# EAGLE board Cruzada_GPS_2015_rev1 (EAGLE 7.4.0)
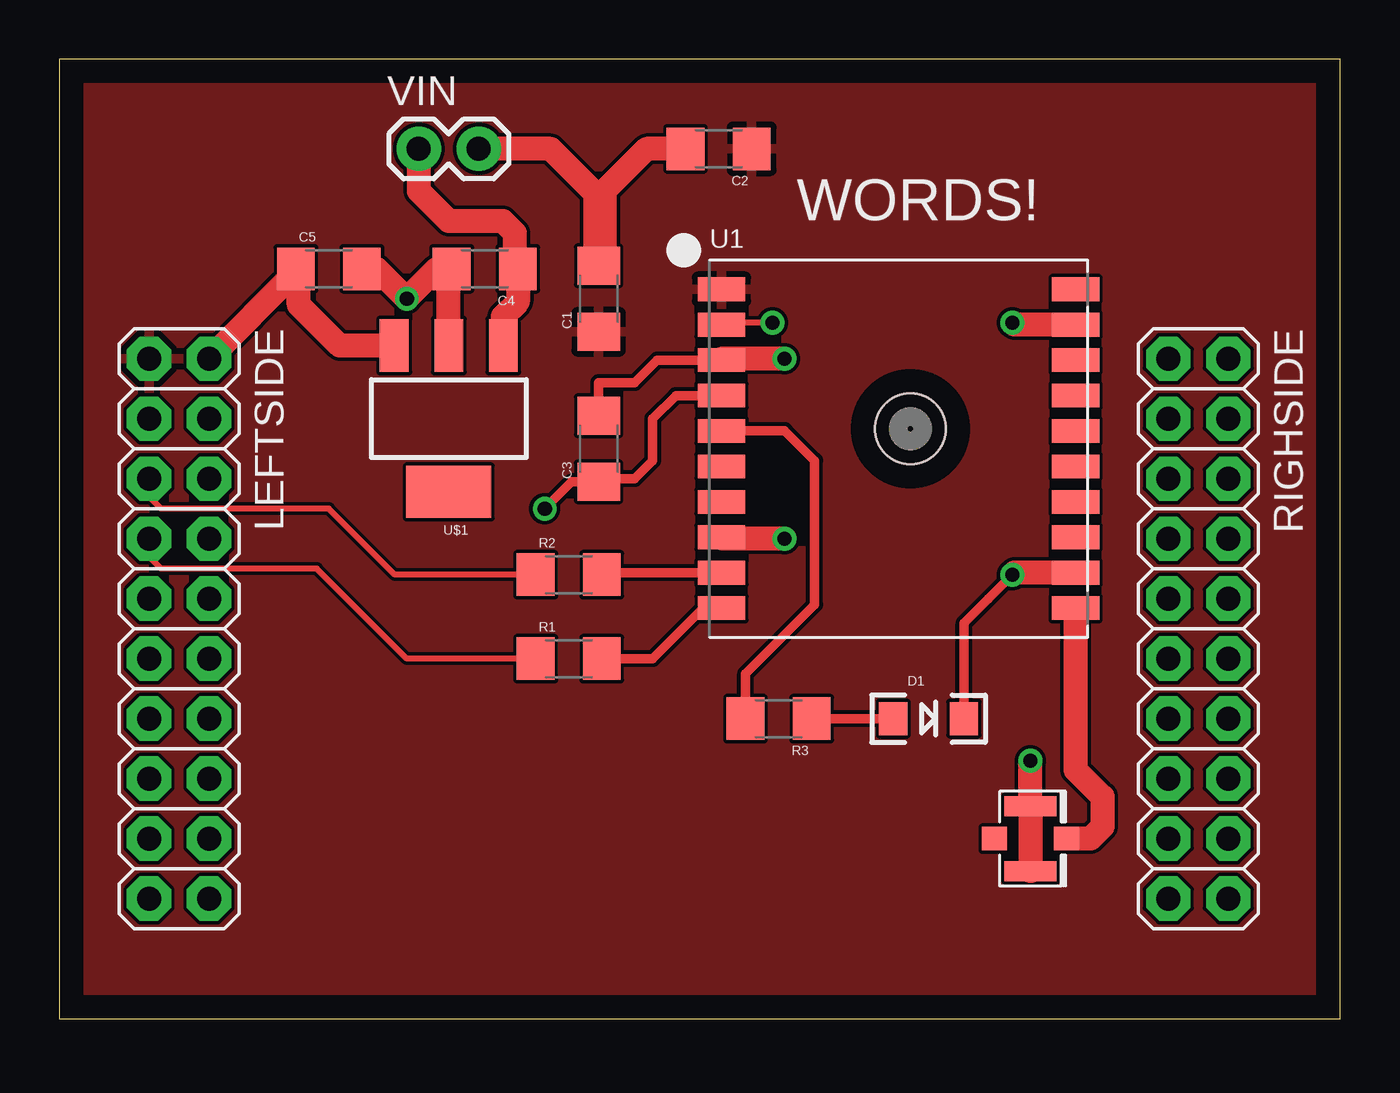
[diagram p0: board, top side]
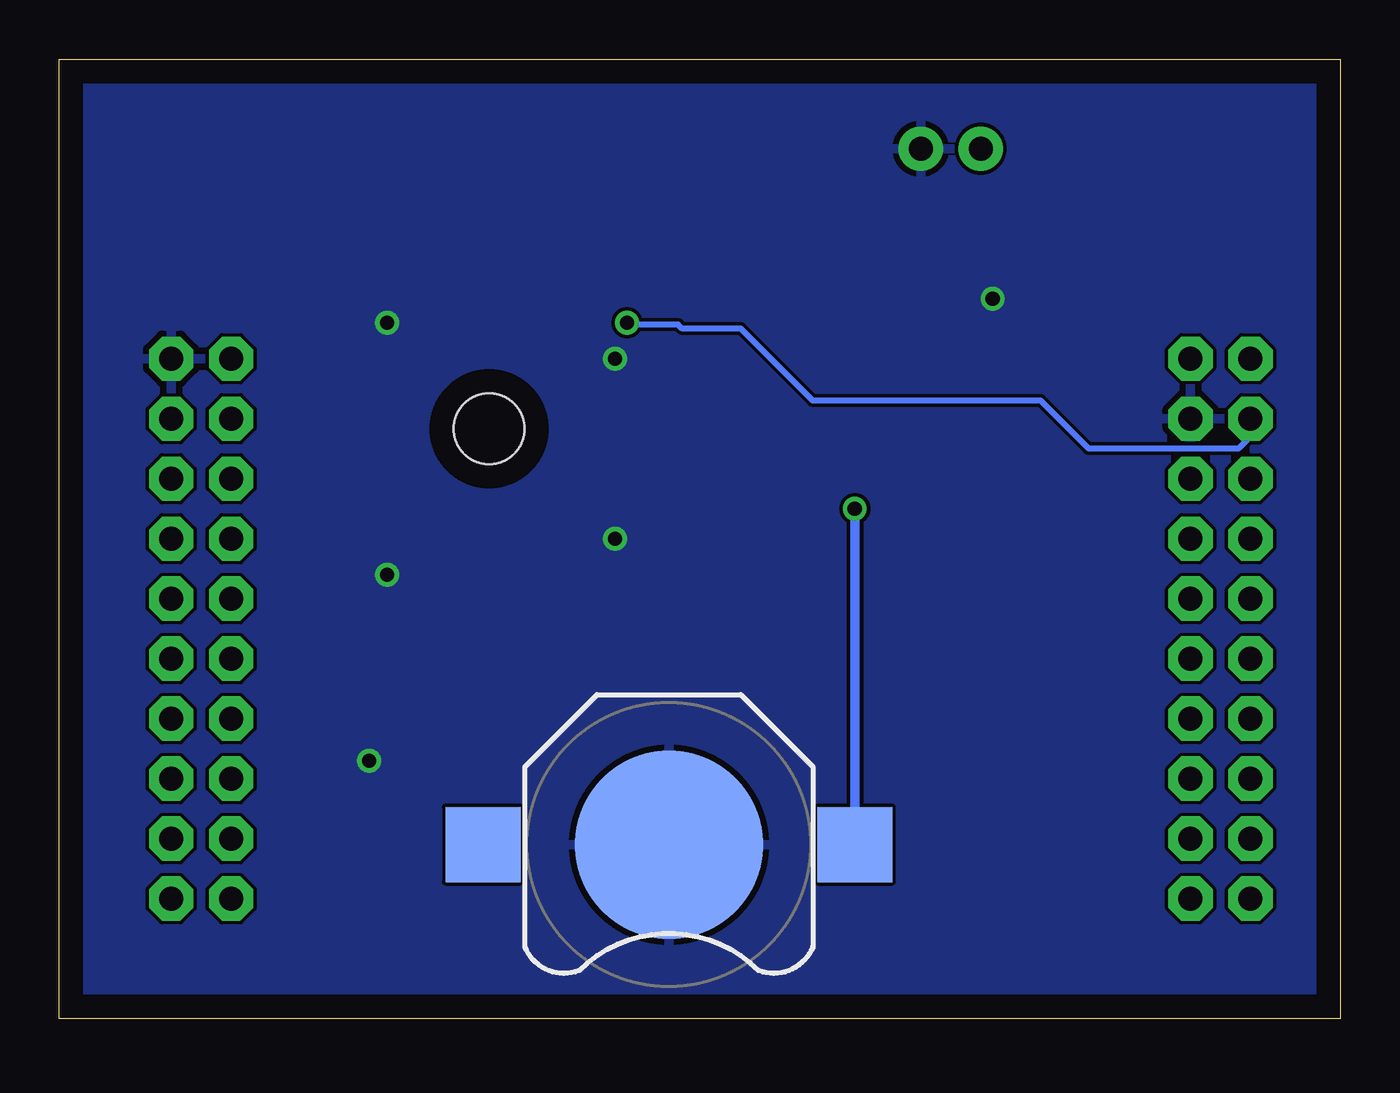
[diagram p1: board, bottom side, seen from below]

Size 54.28 x 40.63 mm. Coordinates in mm from the lower left corner, seen from the top.
Outline: 0,0 54.28,0 54.28,40.63 0,40.63 0,0
Copper layers (1*16): Top 0.035mm / dielectric 1.5mm / Bottom 0.035mm
Design rules "default *": minimum track width 10mil, minimum drill 13mil, track to track 6mil, track to pad 6mil, pad to pad 6mil, via to via 6mil, smd to smd 6mil, copper to edge 40mil, drill to drill 8mil, minimum pad ring 10mil, minimum via ring 8mil, stop-mask expansion 4mil, vias tented up to drill 0mil, thermal gap 10mil

## Footprints (pad centres in the part's own frame; a part is rotated, then mirrored left to right if it is on the bottom)
1206 = smd 1.6 x 1.8: 1 -1.4,0; 2 1.4,0
BATTCON_12MM = smd 8 x 8: GND 0,0 | smd 3.175 x 3.175: PWR@1 -7.874,0; PWR@2 7.874,0
LED-1206 = smd 1.2 x 1.4: A -1.5,0; C 1.5,0
U.FL = smd 2.2 x 0.85: P$1 0,1.375; P$2 0,-1.375 | smd 1.05 x 1: P$3 1.525,0; P$4 -1.525,0
2X10 = drill 1.016 pad 1.88 octagon: 1 -11.43,-1.27; 2 -11.43,1.27; 3 -8.89,-1.27; 4 -8.89,1.27; 5 -6.35,-1.27; 6 -6.35,1.27; 7 -3.81,-1.27; 8 -3.81,1.27; 9 -1.27,-1.27; 10 -1.27,1.27; 11 1.27,-1.27; 12 1.27,1.27; 13 3.81,-1.27; 14 3.81,1.27; 15 6.35,-1.27; 16 6.35,1.27; 17 8.89,-1.27; 18 8.89,1.27; 19 11.43,-1.27; 20 11.43,1.27
FGPMMOPA6H = smd 2 x 1: P$1 -7.5,6.75; P$2 -7.5,5.25; P$3 -7.5,3.75; P$4 -7.5,2.25; P$5 -7.5,0.75; P$6 -7.5,-0.75; P$7 -7.5,-2.25; P$8 -7.5,-3.75; P$9 -7.5,-5.25; P$10 -7.5,-6.75; P$11 7.5,-6.75; P$12 7.5,-5.25; P$13 7.5,-3.75; P$14 7.5,-2.25; P$15 7.5,-0.75; P$16 7.5,0.75; P$17 7.5,2.25; P$18 7.5,3.75; P$19 7.5,5.25; P$20 7.5,6.75 | hole 3: 0.5,0.85
SOT223 = smd 1.219 x 2.235: 1 -2.311,-3.099; 2 0,-3.099; 3 2.311,-3.099 | smd 3.6 x 2.2: 4 0,3.099
1X02 = drill 1.016 pad 1.88: 1 0,0; 2 2.54,0

## Placement (x,y rotation side)
C1  1uF  [1206]  22.86,30.48 90 top
C2  0.01uF  [1206]  27.94,36.83 180 top
C3  1uF  [1206]  22.86,24.13 90 top
C4  1uF  [1206]  18.03,31.75 180 top
C5  1uF  [1206]  11.43,31.75 0 top
CR1220  3.7V  [BATTCON_12MM]  28.45,7.37 180 bottom
D1  [LED-1206]  36.83,12.7 0 top
J1  U.FL  [U.FL]  41.15,7.62 0 top
LEFTSIDE  [2X10]  5.08,16.51 270 top
R1  330  [1206]  21.59,15.24 0 top
R2  330  [1206]  21.59,18.8 0 top
R3  330  [1206]  30.48,12.7 180 top
RIGHSIDE  [2X10]  48.26,16.51 270 top
U1  [FGPMMOPA6H]  35.56,24.13 0 top
U$1  V_REG_LD1117#50  [SOT223]  16.51,25.4 180 top
VIN  [1X02]  15.24,36.83 0 top

## Library data of the parts
C1-C5 = SparkFun-Capacitors
CR1220 = SparkFun-Electromechanical; PROD_ID: BATT-08044
D1 = SparkFun-LED
J1 = SparkFun-Connectors; PROD_ID: CONN-09193
LEFTSIDE RIGHSIDE VIN = SparkFun-Connectors
R1-R3 = SparkFun-Resistors
U1 = adafruit
U$1 = SparkFun-PowerIC

## Nets
3.3V: C1.1 C2.1 LEFTSIDE.1 U1.P$1
5V: C5.1 LEFTSIDE.2 U$1.3
DATA_IN: LEFTSIDE.7 R1.1
DATA_OUT: LEFTSIDE.5 R2.1
EX_ANT: J1.P$3 U1.P$11
GND: C1.2 C2.2 C3.2 C4.2 C5.2 CR1220.GND D1.C J1.P$1 J1.P$2 LEFTSIDE.4 RIGHSIDE.2 U1.P$3 U1.P$8 U1.P$12 U1.P$19 U$1.2 VIN.2
N$1: R3.2 U1.P$5
N$2: D1.A R3.1
N$3: R2.2 U1.P$9
N$4: R1.2 U1.P$10
NRESET: LEFTSIDE.3 U1.P$2
VBACKUP: C3.1 CR1220.PWR@1 U1.P$4
VIN: C4.1 U$1.1 VIN.1

## Tracks (layer width: path | path; a pad name or v marks a point on that pad's centre or on a via)
3.3V
  pour Top: -2.54,49.53 64.77,49.53 64.77,-6.35 -10.16,-6.35 -10.16,49.53
5V
  Top 1.016: U$1.3 11.89,28.5 10.16,30.23 10.16,31.62 C5.1 10.03,31.62 LEFTSIDE.2
DATA_IN
  Top 0.254: R1.1 14.73,15.24 10.92,19.05 4.32,19.05 3.81,19.56 LEFTSIDE.7
DATA_OUT
  Top 0.254: R2.1 14.22,18.8 11.43,21.59 4.32,21.59 3.81,22.1 LEFTSIDE.5
EX_ANT
  Top 1.016: U1.P$11 43.06,10.53 44.2,9.4 44.2,8.13 43.69,7.62 J1.P$3
GND  (via drill 0.6)
  Top 0.406: 39.37,17.78 v40.39,18.8 38.33,16.74 D1.C | U1.P$3 25.34,27.88 24.38,26.92 22.86,26.92 C3.2
  Top 1.016: C5.2 13.46,31.75 v14.73,30.48 16,31.75 C4.2 16.51,31.63 U$1.2 | v30.73,27.94 28.12,27.94 U1.P$3 | v30.73,20.32 28.12,20.32 U1.P$8 | U1.P$12 40.47,18.88 v40.39,18.8 | U1.P$19 40.47,29.38 v40.39,29.46 | J1.P$2 J1.P$1 v41.15,10.92 | C2.2 24.89,36.83 23.11,35.05 23.11,32.13 C1.2 22.73,31.88 22.73,34.93 20.83,36.83 VIN.2
  pour Bottom: 61.21,46.99 60.96,-2.79 -6.35,-2.79 -6.1,46.99
N$1
  Top 0.406: R3.2 29.08,14.6 32,17.53 32,23.62 30.73,24.89 28.07,24.89 U1.P$5
N$2
  Top 0.406: D1.A R3.1
N$3
  Top 0.406: U1.P$9 23.07,18.88 R2.2
N$4
  Top 0.406: U1.P$10 27.29,17.38 25.15,15.24 R1.2
NRESET  (via drill 0.6)
  Top 0.254: v30.23,29.46 28.14,29.46 U1.P$2
  Bottom 0.254: LEFTSIDE.3 3.81,24.64 4.32,24.13 10.67,24.13 12.7,26.16 22.35,26.16 25.4,29.21 27.89,29.21 U1.P$2 30.14,29.38 v30.23,29.46
VBACKUP  (via drill 0.6)
  Top 0.406: U1.P$4 26.13,26.38 25.15,25.4 25.15,23.62 24.38,22.86 22.99,22.86 C3.1 21.71,22.73 v20.57,21.59
  Bottom 0.406: v20.57,21.59 CR1220.PWR@1
VIN
  Top 1.016: VIN.1 15.24,35.05 16.51,33.78 18.8,33.78 19.3,33.27 19.3,31.88 C4.1 19.43,30.36 18.8,29.72 18.8,28.52 U$1.1

## Text on the board
tNames: WORDS!